# Altium PCB 468524-L.PcbDoc (part 3 of 4)
Units mm, origin at the board's own origin, x right, y up, seen from the top; angles counter-clockwise.
Board outline 160 x 90 mm, 2 copper layers (Top Layer, Bottom Layer), stack 1.571 mm thick; 225 components, 131 nets, 717 pads, 560 vias.
Unrouted connection lines stored in the file: 2.
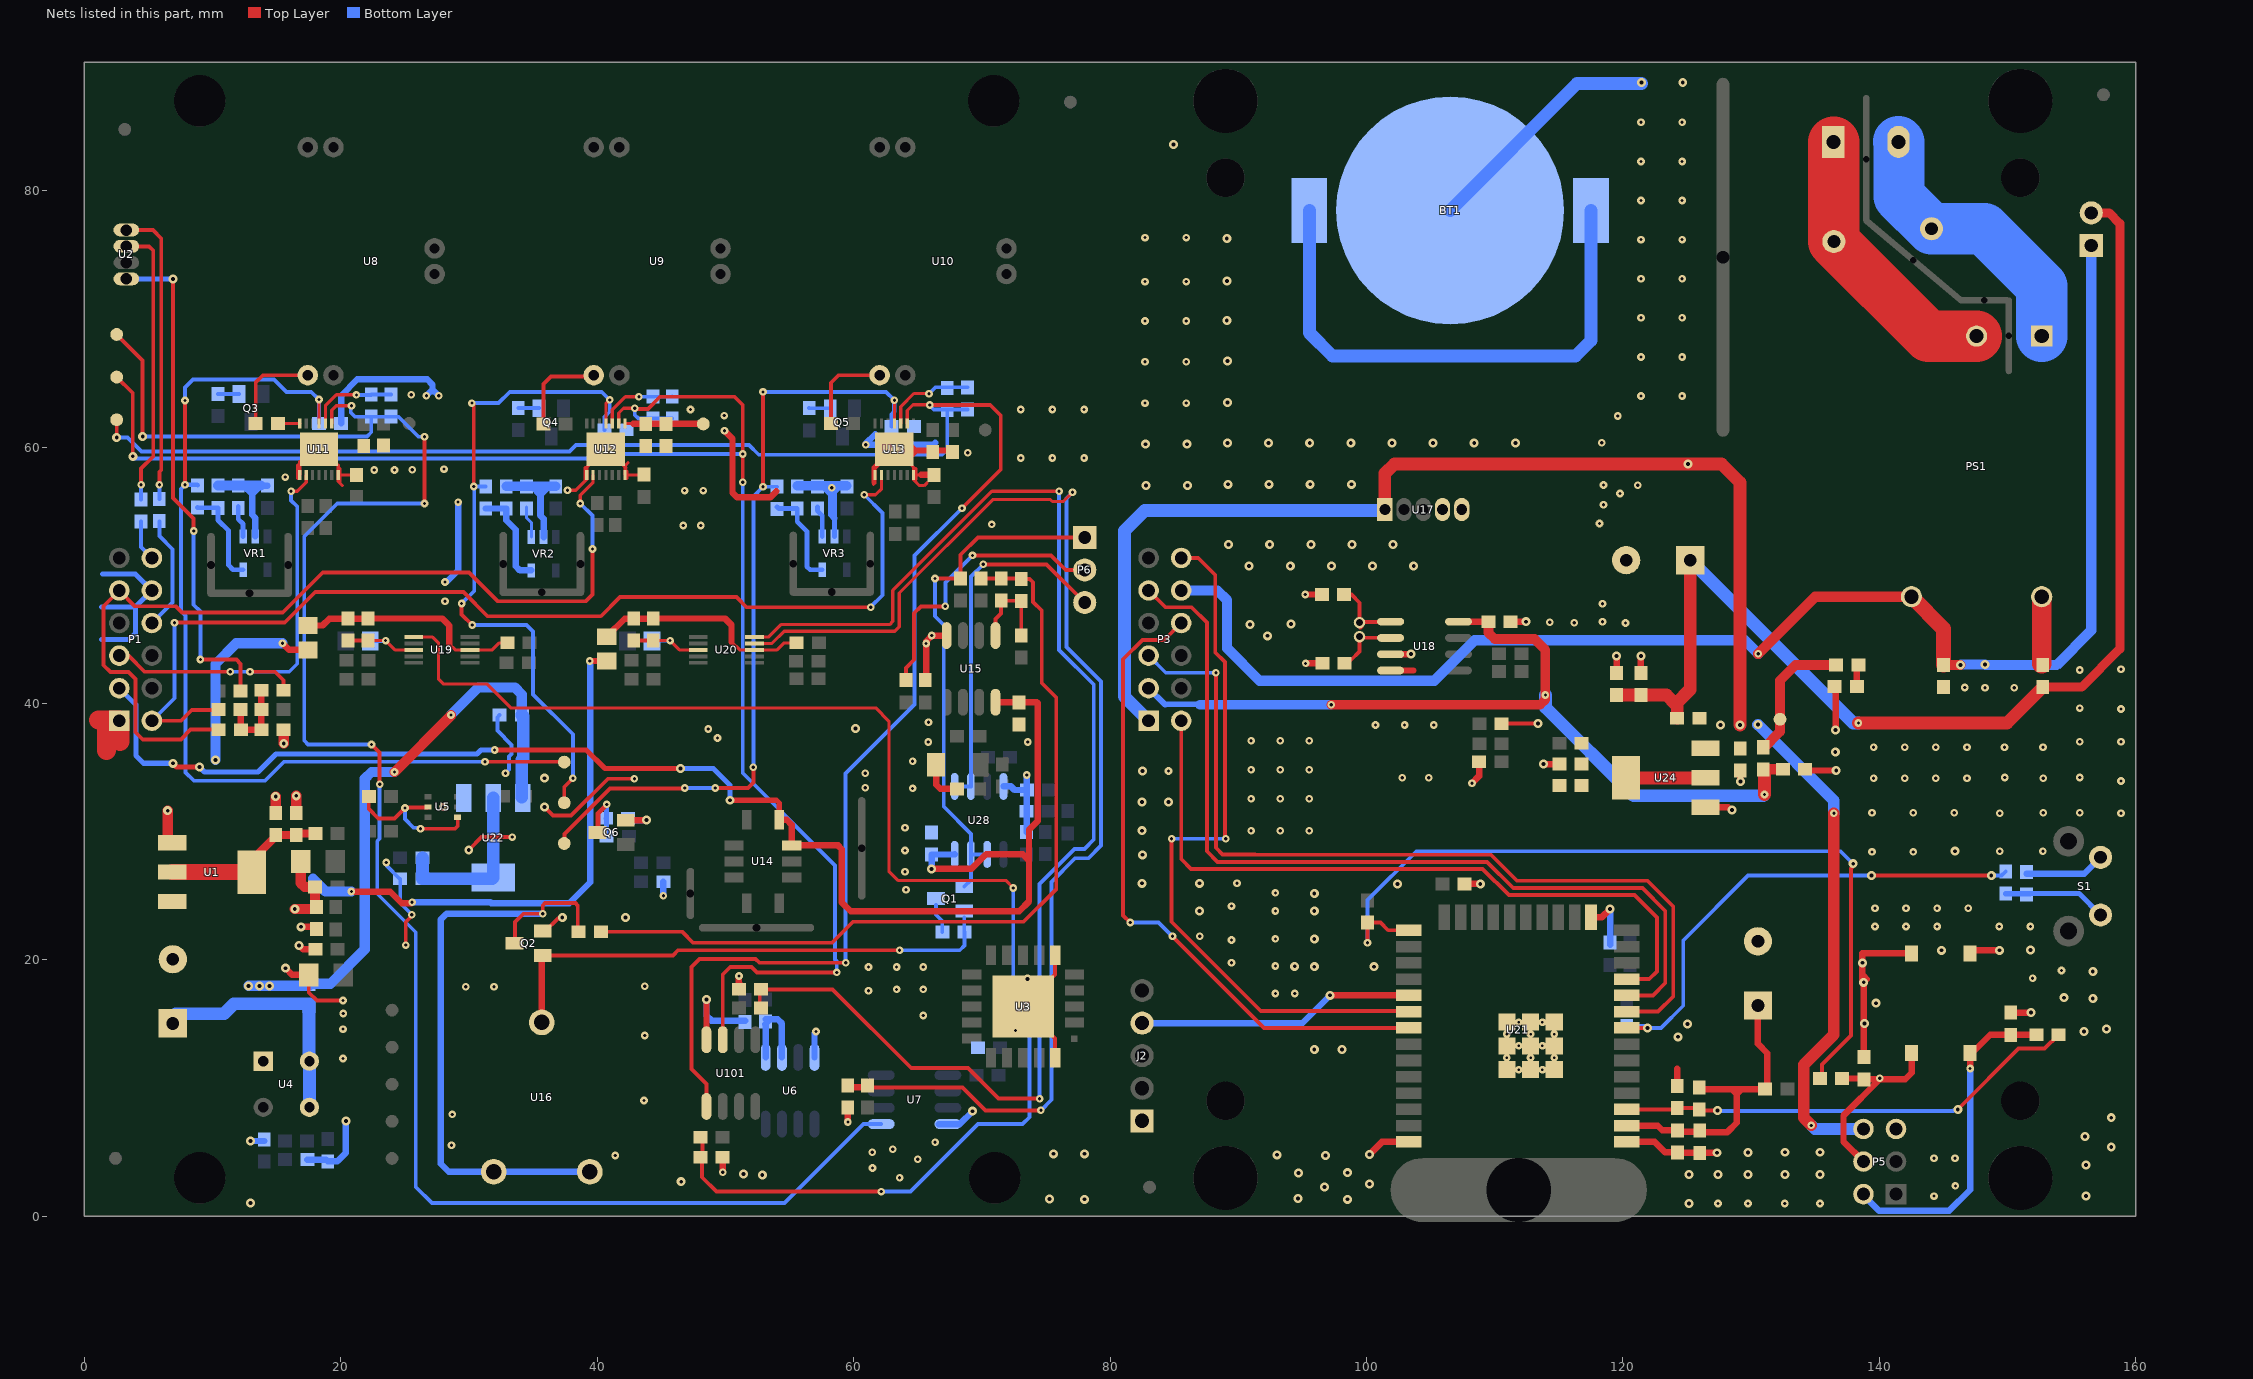
[diagram p2: the nets of this part, all layers, seen from the top]

## Via types
v1: diameter 0.6, hole 0.25, Top Layer to Bottom Layer, tented both sides, 365 vias
v2: diameter 0.7, hole 0.3, Top Layer to Bottom Layer, tented both sides, 179 vias
v3: diameter 0.6, hole 0.2, Top Layer to Bottom Layer, 12 vias
v4: diameter 0.6, hole 0.2, Top Layer to Bottom Layer, tented both sides, 3 vias
v5: diameter 0.6, hole 0.3, Top Layer to Bottom Layer, tented both sides, 1 vias

## Nets (pads, with @x,y where several pads share a name; then routed paths per layer and width w, separated by ;. In a path a pad name is that pad's centre, name@x,y a point inside that pad or via, vN(x,y) a via of type N, cw(c..) or ccw(c..) an arc to the next point about the centre after c; other vN are vias at no path point) (continued)
5P0_RAW: C49.1 C50.1 C51.1 L4.1 L8.2 U23.2 | length 94.7
  Top Layer w0.7: L8.2@152.75,41.279 155.777,41.279 158.75,44.252 158.75,77.425 157.91,78.265 U23.2@156.525,78.265
  Top Layer w1: C50.1@119.499,40.656 123.385,40.656 124.096,39.945 ; L4.1@124.232,38.845 124.232,39.809 124.096,39.945 ; C49.1@125.25,51.175 125.25,41.099 124.096,39.945 ; v1(138.359,38.47) 149.942,38.47 L8.2@152.75,41.279
  Bottom Layer w0.3: C49.1@125.25,51.175 C49.1@125.398,51.027
  Bottom Layer w1: C49.1@125.398,51.027 137.955,38.47 v1(138.359,38.47)
5VCC: C19.1 C57.2 L4.2 L6.1 P1.1 P3.1 P5.6 R20.2 R70.1 T15.1 U1.3 U17.1 U22.3 U24.3 | length 188.9
  Top Layer w0.762: L6.1@130.946,36.495 132.246,37.795 T15.1@132.246,38.77 132.246,41.795 133.446,42.995 R70.1@136.632,42.995 R70.1@136.796,42.995
  Top Layer w0.8: v1(24.194,34.65) 28.59,39.046 v1(28.59,39.1)
  Top Layer w0.9: v1(134.681,7.092) 134.096,7.677 134.096,11.815 136.45,14.169 v1(136.45,31.439)
  Top Layer w1: U17.1@101.425,55.125 101.425,57.925 102.175,58.675 v2(125.075,58.675) 127.675,58.675 129.121,57.229 v2(129.121,38.326)
  Top Layer w1.5: 1.1,38.7 P1.1@2.725,38.7 ; 1.725,36.35 1.725,37.975 ; 2.775,37.025 P1.1@2.775,38.65
  Bottom Layer w0.3: U22.3@34.114,32.696 U22.3@34.185,32.625
  Bottom Layer w0.8: v2(12.8,17.975) v2(13.65,17.975) v2(14.45,17.975) R20.2@17.525,17.975 ; R20.2@17.525,18.139 19.194,18.139 21.875,20.819 21.875,34.132 22.394,34.65 v1(24.194,34.65) ; v1(28.59,39.1) 30.74,41.25 33.564,41.25 34.114,40.7 C19.1@34.114,39.1
  Bottom Layer w0.9: v2(130.53,38.351) 136.45,32.431 v1(136.45,31.439) ; v1(134.681,7.092) 134.961,6.812 P5.6@138.755,6.812
  Bottom Layer w1: U22.3@34.114,32.696 34.114,35.581 34.225,35.692 34.225,38.989 C19.1@34.114,39.1 ; P3.1@83.005,38.65 81.125,40.53 81.125,53.475 82.7,55.05 101.35,55.05 U17.1@101.425,55.125
  other v2: 127.596,38.32
5VCC_D: C55.2 C111.2 L6.2 P3.2 U18.8 | length 68.4
  Top Layer w0.3: L6.2@130.946,34.857 L6.2@131.031,34.772
  Top Layer w0.5: U18.8@107.175,46.381 C111.2@109.516,46.381
  Top Layer w0.75: v1(97.25,39.9) 113.55,39.9 113.95,40.3 v1(113.95,40.656) 113.95,44.181 113.106,45.025 110,45.025 109.516,45.509 C111.2@109.516,46.381
  Top Layer w0.8: L6.2@130.946,34.87 C55.2@132.482,34.87 132.596,34.87 C55.2@132.546,34.82
  Top Layer w1: v1(131.031,32.893) L6.2@131.031,34.772
  Bottom Layer w0.3: v1@130.976,32.837 v1(131.031,32.893)
  Bottom Layer w0.43: 84.295,39.925 87,39.925
  Bottom Layer w0.45: P3.2@83.005,41.19 84.295,39.9
  Bottom Layer w0.75: 87,39.9 v1(97.25,39.9)
  Bottom Layer w1: v1(113.95,40.656) 113.95,39.691 120.84,32.802 130.94,32.802 v1@130.976,32.837
5VCC_D2: C54.2 C65.2 P1.2 U14.9 U14.10 U15.8 U28.8 | length 117.2
  Top Layer w0.4: v2(6.9,35.332) 7.182,35.05 v2(8.975,35.05) ; v1(31.996,36.375) 39.15,36.375 40.6,34.925 v2(46.5,34.925) ; v2(50.35,32.45) 53.995,32.45 54.195,32.25 U14.10@54.195,30.925
  Top Layer w0.5: U14.10@54.195,30.925 54.775,30.925 55.175,30.525 U14.9@55.175,28.925 58.782,28.925 59.075,28.632 59.075,24.474 59.76,23.789 72.914,23.789 73.675,24.55 73.675,27.812 73.675,28.65 73.675,30.15 74.37,30.845 74.37,40.014 74.295,40.089 C65.2@72.9,40.089 ; v2(66.075,27.1) 69.194,27.1 70.325,28.231 73.181,28.231 73.6,27.812 ; U15.8@71.061,40.095 C65.2@72.894,40.095
  Top Layer w0.8: C65.2@72.894,40.095 C65.2@72.9,40.089
  Bottom Layer w0.4: P1.2@2.725,41.19 4.015,39.9 4.015,35.935 4.618,35.332 v2(6.9,35.332) ; v2(8.975,35.05) 9.375,34.65 13.544,34.65 14.944,36.05 30.613,36.05 30.938,36.375 v1(31.996,36.375) ; v2(46.5,34.925) 49.05,34.925 50.35,33.625 v2(50.35,32.45)
  Bottom Layer w0.5: v2(66.075,27.1) C54.2@66.075,28.217 67.863,28.217 U28.8@67.874,28.227
AP_RST: R74.2 R78.2 U21.8 | length 39.3
  Top Layer w0.3: U21.8@120.292,14.692 v2(121.925,14.692)
  Top Layer w0.305: v2(139.371,26.575) v2(148.725,26.575)
  Bottom Layer w0.3: R74.2@120.3,14.861 121.755,14.861 v2(121.925,14.692) 122.967,14.692 124.7,16.425 124.7,21.525 129.75,26.575 v2(139.371,26.575) ; v2(148.725,26.575) 149.537,26.575 R78.2@149.85,26.888
BLUE_0: P3.10 U21.31 | length 51.6
  Top Layer w0.305: v1(81.575,22.911) 81.02,23.466 81.02,43.446 82.525,44.95 84.225,44.95 P3.10@85.545,46.27 ; v1(84.861,21.839) 92.008,14.692 U21.31@103.292,14.692
  Bottom Layer w0.305: v1(81.575,22.911) 83.789,22.911 v1(84.861,21.839)
BLUE_I: P1.10 R7.1 | length 9
  Bottom Layer w0.3: P1.10@5.265,46.27 6.875,47.88 6.875,52.025 5.85,53.05 R7.1@5.85,54.211
C2_H2S: C102.2 R44.1 T7.1 U12.9 U101.3 | length 131.1
  Top Layer w0.25: U12.9@41.675,61.825 41.675,62.65 42.05,63.025 v1(42.925,63.025)
  Top Layer w0.3: v1(42.925,63.025) 42.975,62.975 43.95,62.975 44.896,63.921 50.714,63.921 51.35,63.285 v1(51.35,59.45) v1(51.35,57.25)
  Top Layer w0.305: T7.1@2.52,65.454 3.775,64.199 v2(3.775,59.275) ; U101.3@49.79,13.775 49.79,18.865 50.377,19.452 52.023,19.452 52.45,19.025 v1(58.675,19.025)
  Bottom Layer w0.3: v2(3.775,59.275) 3.95,59.1 41.425,59.1 41.775,59.45 v1(51.35,59.45) ; v1(42.925,63.025) 42.925,62.495 43.208,62.211 R44.1@44.35,62.211 44.363,62.224 C102.2@45.85,62.224 ; v1(51.35,57.25) 51.35,34.575 58.55,27.375 58.55,20.025 58.675,19.9 v1(58.675,19.025)
C2_O3: C101.2 R15.1 T4.1 U7.5 U11.9 | length 150.2
  Top Layer w0.25: U11.9@19.3,61.825 19.3,62.875 19.65,63.225 v1(20.829,63.225)
  Top Layer w0.3: v1(22.4,36.8) 23.031,36.169 v1(23.031,33.7) ; v1(26.525,55.6) v1(26.525,60.8)
  Top Layer w0.305: T4.1@2.52,68.783 4.55,66.753 v2(4.55,60.825)
  Bottom Layer w0.3: v2(4.55,60.825) 22.04,60.825 22.371,61.156 C101.2@22.371,62.361 ; v1(20.829,63.225) 20.775,63.171 20.775,62.7 21.114,62.361 C101.2@22.371,62.361 R15.1@23.921,62.361 24.489,62.361 26.05,60.8 v1(26.525,60.8) ; v1(22.4,36.8) 17.45,36.8 17.15,37.1 17.15,53.025 19.725,55.6 v1(26.525,55.6) ; v1(23.031,33.7) 23.031,29.449 22.84,29.258 22.84,25.16 25.85,22.15 25.85,2.3 27.123,1.027 54.602,1.027 60.77,7.195 U7.5@62.147,7.195
C2_SO2: C103.2 R50.1 T10.1 U13.9 U101.5 | length 153.8
  Top Layer w0.25: U13.9@64.175,61.825 64.175,62.85 64.628,63.303 65.903,63.303 v1(65.928,63.278)
  Top Layer w0.305: T10.1@2.52,62.125 2.525,62.119 v2(2.525,60.75) ; U101.5@48.52,8.575 48.52,10.305 47.35,11.475 47.35,19.45 47.978,20.078 52.347,20.078 52.65,19.775 v1(59.375,19.775) ; v1(65.928,63.278) 70.653,63.278 71.475,62.456 71.475,58.25 v1(68.45,55.225)
  Bottom Layer w0.3: v2(2.525,60.75) 3.361,60.75 4.461,59.65 37.85,59.65 38.35,60.15 51.85,60.15 52.6,59.4 66.9,59.4 67.3,59.8 C103.2@67.3,62.893 ; v1(65.928,63.278) 65.928,63.253 65.925,63.25 66.246,62.929 R50.1@68.875,62.929
  Bottom Layer w0.305: v1(59.375,19.775) 59.375,34.546 64.75,39.921 64.75,51.525 v1(68.45,55.225)
C3_H2S: C113.2 R115.1 U20.5 | length 107.3
  Top Layer w0.25: U20.5@52.263,45.175 53.35,45.175 54.325,46.15 62.8,46.15 63.05,46.4 63.05,48.819 70.783,56.552 v1(76.025,56.552)
  Top Layer w0.305: C113.2@52.675,17.7 52.675,16.364 R115.1@52.789,16.25 ; C113.2@52.789,17.7 58.35,17.7 64.494,11.556 68.904,11.556 71.284,9.175 v1(74.504,9.175)
  Bottom Layer w0.305: v1(74.504,9.175) 74.504,25.938 74.6,26.035 77.215,28.65 78,28.65 78.725,29.375 78.725,41.475 76.025,44.175 v1(76.025,56.552)
C3_O3: C112.2 R114.1 U20.4 | length 99.3
  Top Layer w0.25: U20.4@52.263,44.675 53.625,44.675 54.575,45.625 63.2,45.625 63.55,45.975 63.55,48.612 70.838,55.9 75.35,55.9 75.5,55.75 76.35,55.75 v1(77.075,56.475)
  Top Layer w0.305: R114.1@61.075,10.05 68.495,10.05 70.28,8.265 v1(74.6,8.265)
  Top Layer w0.508: C112.2@59.55,10.1 59.6,10.05 R114.1@61.075,10.05
  Bottom Layer w0.305: v1(74.6,8.265) 75.425,9.09 75.425,26.075 77.275,27.925 78.3,27.925 79.3,28.925 79.3,41.696 76.588,44.408 76.588,55.988 v1(77.075,56.475)
C3_SO2: C114.2 R116.1 U19.6 | length 113.4
  Top Layer w0.25: U19.6@25.675,45.175 27.156,45.175 27.625,44.706 27.625,41.881 27.981,41.525 31.375,41.525 33.25,39.65 61.725,39.65 62.75,38.625 62.75,26.9 62.975,26.675 62.975,26.673 63.45,26.198 71.86,26.198 v1(72.45,25.608)
  Top Layer w0.305: C114.2@48.061,4.6 48.225,4.764 R116.1@48.225,6.175 ; C114.2@48.175,4.6 48.175,3.05 49.3,1.925 v1(62.15,1.925)
  Bottom Layer w0.305: v1(62.15,1.925) 64.438,1.925 69.71,7.198 73.173,7.198 73.7,7.725 73.7,17.025 72.45,18.275 v1(72.45,25.608)
CH2S: R43.1 U9.5 | length 7.3
  Top Layer w0.3: R43.1@35.811,61.8 35.811,64.911 36.4,65.5 39.625,65.5 U9.5@39.725,65.6
CO3: R14.1 U8.5 | length 7.5
  Top Layer w0.3: R14.1@13.361,61.839 13.361,65.029 13.933,65.6 U8.5@17.425,65.6
CSO2: R49.1 U10.5 | length 7.2
  Top Layer w0.3: R49.1@58.238,61.839 58.238,65.016 58.822,65.6 U10.5@62.025,65.6
EN: C61.2 R73.2 R79.2 U21.3 | length 36.2
  Top Layer w0.305: U21.3@120.292,8.342 122.8,8.342 123.35,8.342 124.037,8.342 C61.2@124.188,8.493 ; C61.2@124.245,8.436 125.848,8.436 126.034,8.25 v2(127.375,8.25) ; v2(146.112,8.342) 150.845,13.075 152.889,13.075 R79.2@153.964,14.15
  Bottom Layer w0.305: v2(127.375,8.25) 127.4,8.225 145.736,8.225 145.777,8.266 146.036,8.266 v2(146.112,8.342)
EN_F: C64.2 P5.2 R79.1 S3.1 | length 26.1
  Top Layer w0.5: v1(147.075,11.525) S3.1@147.075,12.6 ; S3.1@147.075,12.75 S3.1@147.075,12.6 ; R79.1@152.236,14.15 150.261,14.15 C64.2@150.25,14.161 148.636,14.161 S3.1@147.075,12.6
  Bottom Layer w0.5: P5.2@138.755,1.732 138.755,1.643 139.966,0.432 145.434,0.432 147.075,2.073 v1(147.075,11.525)
GND1_ADS: C46.1 C47.1 C48.1 FB4.1 U20.3 | length 17.4
  Top Layer w0.25: 50.475,44.8 51.1,44.175 U20.3@52.263,44.175 54.025,44.175 54.575,44.725 C46.1@55.561,44.725
  Top Layer w0.5: FB4.1@40.75,45.217 42.147,46.614 44.353,46.614 C48.1@44.367,46.629 49.971,46.629 50.475,46.125 50.475,44.8
GND_ADS: C43.1 C44.1 C45.1 FB3.1 U19.3 | length 17.9
  Top Layer w0.25: 28.459,44.632 28.916,44.175 U19.3@30.075,44.175 31.821,44.175 32.371,44.725 C43.1@32.986,44.725
  Top Layer w0.5: FB3.1@17.45,46.077 18.577,46.077 19.114,46.614 22.1,46.614 C45.1@22.114,46.629 27.906,46.629 28.459,46.075 28.459,44.632
GND_L: C2.2 C5.1 C7.1 C8.1 C9.1 C10.1 C11.1 C12.1 C13.1 C14.1 C15.1 C17.1 C18.1 C19.2 C20.1 C21.1 C25.1 C26.1 C27.1 C29.1 C30.1 C31.1 C32.1 C34.1 C35.1 C36.1 C38.1 C39.1 C40.1 C41.1 C54.1 C65.1 C66.1 C112.1 C113.1 C114.1 L2.2 Q2.3 Q6.2 R21.2 R23.1 R36.1 R38.1 R54.1 R71.1 R86.1 U3.6 U3.20 U3.21 U5.2 U5.4 U5.DIEPAD U6.4 U7.4 U11.1 U11.7 U11.15 U12.1 U12.7 U12.15 U13.1 U13.7 U13.15 U15.4 U22.1 U28.4 U101.4 VR1.2 VR2.2 VR3.2 ZD1.1 | length 195.9
  Top Layer w0.25: 16.65,57.55 16.65,58.575 ; 16.775,58.875 16.8,58.85 U11.1@16.8,57.825 ; 19.8,58.58 U11.7@19.8,57.825 ; 19.937,57.275 19.937,57.825 ; 19.937,58.3 19.937,57.825 ; 20.134,56.992 19.8,57.326 U11.7@19.8,57.825 ; C14.1@21.214,57.825 19.937,57.825 ; v1(37.681,56.625) 38.321,56.625 39.175,57.479 U12.1@39.175,57.825 39.175,58.325 ; 39.041,57.418 39.041,58.381 ; 39.091,58.331 U12.15@39.405,58.646 ; U12.15@41.914,58.69 42.175,58.429 ; 42.179,58.351 42.175,58.354 ; U12.7@42.214,57.63 U12.7@42.214,57.825 ; 42.214,58.355 U12.7@42.214,57.825 ; 42.225,58.379 42.175,58.429 ; 42.304,57.555 42.304,57.825 ; 42.304,58.105 42.304,57.825 ; 42.4,58.775 42.175,58.55 42.175,58.429 ; C32.1@43.65,57.839 43.636,57.825 42.304,57.825 ; 61.525,57.186 61.525,58.421 U13.15@61.69,58.585 ; 61.538,57.082 61.675,57.219 U13.1@61.675,57.825 61.675,58.325 U13.15@63.175,59.825 ; U13.15@64.395,58.696 64.764,58.327 ; U13.7@64.674,57.875 64.674,58.377 ; 64.864,57.466 64.864,57.825 ; 64.864,58.327 64.864,57.825 ; 65.275,57.825 64.864,57.825 ; 65.725,57.225 65.492,56.992 65.133,56.992 64.675,57.45 U13.7@64.675,57.825 64.864,57.825 ; U11.7@19.8,57.825 19.937,57.825 ; 42.175,58.354 42.175,58.429 ; 42.175,58.354 U12.7@42.175,57.825 U12.7@42.214,57.825 ; U12.7@42.214,57.825 42.304,57.825
  Top Layer w0.3: C2.2@17.504,18.825 17.504,17.462 18.14,16.825 v1(20.176,16.825) ; C14.1@21.214,57.825 C14.1@21.225,57.814 ; C10.1@22.186,32.743 22.186,31.768 22.918,31.035 24.188,31.035 v1(25,31.847) 25.039,31.886 26.776,31.886 U5.2@26.815,31.925 ; v1(25.068,21.15) 25.068,22.95 25.535,23.417 v1(25.535,23.526) ; v1(26.215,30.225) 28.902,30.225 29.124,30.447 29.124,31.116 U5.4@29.115,31.125 ; v2(29.98,28.58) 30.975,29.575 v1(33.375,29.575) ; Q2.3@35.75,22.25 35.95,22.25 36.935,23.235 37.2,23.235 v2(37.277,23.312) ; v2(35.875,31.925) 36.543,31.257 37.96,31.257 40.828,34.125 v1(42.899,34.125) ; U3.20@75.715,12.364 75.715,13.864 U3.21@73.215,16.364 75.715,18.864 U3.6@75.715,20.364
  Top Layer w0.5: v2(15.7,19.35) 16.225,18.825 C2.2@17.504,18.825 ; v2(16.75,21.125) 17.05,20.825 C5.1@18.011,20.825 ; v2(16.907,22.579) L2.2@18.107,22.579 ; C2.2@17.471,19 C2.2@17.5,19.029 ; Q6.2@42.225,30.89 42.235,30.9 v2(43.85,30.9) ; U101.4@48.52,13.775 v2(48.52,16.92) ; v1(49.789,3.436) C114.1@49.789,4.6 ; v1(49.925,61.275) 50.547,60.653 50.547,56.439 50.9,56.086 53.511,56.086 53.975,56.55 ; v1(59.55,7.35) C112.1@59.55,8.486 ; U13.15@64.307,60.2 64.682,59.825 ; U13.15@64.42,59.3 64.795,59.675 ; 64.707,59.725 C39.1@67.701,59.725 ; 65.275,57.825 66.25,57.825 C41.1@66.261,57.814 ; R54.1@65.575,41.814 65.65,41.889 v1(65.65,44.68) 65.65,44.85 v1(66.095,45.295) U15.4@67.251,45.295 ; ZD1.1@66.431,35.221 66.431,33.669 66.75,33.35 68.036,33.35 C66.1@68.061,33.325
  Top Layer w0.508: v1(51.05,18.75) 51.05,18.186 C113.1@51.061,18.175
  Bottom Layer w0.3: v1(23.54,27.599) 23.598,27.541 23.598,27.32 24.585,26.333 C15.1@24.636,26.333 24.636,24.425 v1(25.535,23.526) ; v1(25,31.847) 25,30.985 25.684,30.302 26.139,30.302 v1(26.215,30.225) ; C19.2@32.386,39.1 32.209,38.923 32.209,37.882 33.325,36.765 33.325,36.064 33.123,35.863 33.123,34.825 v1(32.85,34.552)
  Bottom Layer w0.381: VR3.2@58.502,53.024 58.502,54.457 58.502,56.552 58.766,56.816
  Bottom Layer w0.5: C9.1@12.402,56.989 13.083,56.308 ; v2(12.95,5.875) C17.1@14.027,5.875 ; VR1.2@13.332,53.029 13.332,54.462 13.083,54.711 13.083,56.308 ; C7.1@14.282,56.989 13.764,56.989 13.083,56.308 ; R23.1@17.391,4.425 18.836,4.425 R21.2@18.975,4.286 19.739,4.286 20.402,4.95 v2@20.402,7.425 ; C13.1@20.029,61.839 20.029,64.01 21.293,65.275 26.735,65.275 27.153,64.856 27.153,64.477 ; v1(26.675,63.999) 27.153,64.477 ; v1(27.632,63.999) 27.153,64.477 ; v1(28.134,49.475) 28.153,49.494 28.261,49.494 29.151,50.385 v1(29.151,55.703) ; C26.1@34.486,56.93 C26.1@34.887,56.93 ; C26.1@34.883,56.934 C26.1@34.887,56.93 ; VR2.2@35.813,52.974 35.813,54.407 ; 36.245,56.934 35.615,56.305 ; R36.1@42.414,31.037 42.55,30.9 v2(43.85,30.9) ; v1(45.158,25) R38.1@45.158,26.093 ; v2(48.52,16.92) 48.52,15.655 48.908,15.267 C18.1@51.531,15.267 ; U6.4@56.946,12.395 56.946,14.269 57.066,14.389 v1(57.066,14.416) ; C35.1@57.572,56.984 58.253,56.303 ; 58.502,54.457 58.253,54.706 58.253,56.303 ; 58.934,56.984 58.253,56.303 ; 61.68,61 60.95,60.27 v1(60.95,60.175) 66.221,60.175 66.371,60.325 ; U7.4@66.647,7.195 U7.4@67.347,7.195 68.271,7.195 69.276,8.2 v2(69.278,8.2) ; U28.4@71.684,33.527 72.273,33.527 72.55,33.25 C21.1@73.511,33.25 ; R71.1@73.486,29.962 73.511,29.986 C21.1@73.511,33.25 ; v1(73.5,34.425) 73.5,33.261 C21.1@73.511,33.25 ; C26.1@34.887,56.93 35.564,56.253 ; C26.1@34.887,56.93 35.361,56.93 35.615,56.675 35.615,56.305 ; 35.564,56.253 35.615,56.305 ; 35.564,56.253 35.564,54.656 35.813,54.407 ; 35.615,56.305 35.615,54.61 35.813,54.412 35.813,54.407
  Bottom Layer w0.762: C8.1@10.425,56.989 C9.1@12.006,56.989 12.402,56.989 13.764,56.989 ; C27.1@32.906,56.934 34.883,56.934 36.245,56.934 C25.1@36.763,56.934 ; C36.1@55.594,56.984 57.572,56.984 58.934,56.984 C34.1@59.452,56.984
  other v1: 63.585,3 61.475,3.775 65,4.45 41.4,4.74 61.452,5 63.046,5.225 28.635,5.55 66.354,5.775 28.691,7.95 43.65,9.037 20.176,12.302 43.7,14.1 72.622,14.484 20.176,14.6 65.425,15.655 20.196,15.821 61.15,17.592 63.35,17.7 65.425,17.7 29.743,17.9 31.95,17.9 43.7,17.95 61.15,19.45 63.35,19.452 65.425,19.452 64.075,25.468 64.009,26.873 64.009,28.533 64.009,30.3 27.965,31.925 64.6,33.375 60.91,33.425 60.91,34.549 64.6,35.485 65.825,37 73.57,37 49.375,37.3 48.657,38 65.829,38.541 28.134,47.965 46.704,53.885 48.075,53.885 70.775,53.965 46.816,56.6 48.275,56.6 58.292,56.816 15.664,57.65 22.614,58.2 24.194,58.2 25.575,58.225 28.05,58.275 73.025,59.15 75.5,59.15 77.975,59.15 68.9,59.55 49.9,62.45 73.025,62.925 75.5,62.925 77.975,62.925 47.275,62.928 25.492,64.082
  other v2: 12.95,1.027 78,1.329 75.26,1.35 46.55,2.7 52.875,3.225 51.399,3.3 75.575,4.875 78,4.875 20.405,7.423 73.565,18.514 42.192,23.312 35.875,34.171 60.152,38.05
GND_POWER: BT1.1 C49.2 C50.2 C51.2 C52.1 C53.2 C55.1 C56.1 C57.1 C58.2 C59.1 C60.1 C61.1 C62.1 C63.1 C64.1 C67.1 C111.1 C115.1 C116.1 D2.2 J2.1 L5.2 P5.5 R75.1 R81.2 S1.2 S2.2 S3.2 U17.4 U17.5 U18.4 U21.1 U21.15 U21.38 U21.39 U24.1 | length 83.9
  Top Layer w0.3: C67.1@110.538,38.426 v2(113.373,38.426)
  Top Layer w0.5: v1(95.225,48.5) C115.1@96.511,48.5 ; v1(95.25,43.125) C116.1@96.561,43.125 ; U18.4@101.875,42.571 103.654,42.571 ; R75.1@107.479,25.925 R75.1@107.642,25.925 v2(108.875,25.925) ; C111.1@111.145,46.381 111.151,46.375 v2(112.425,46.375) ; v2(113.796,35.27) C52.1@115.035,35.27 C52.1@115.05,35.27 ; U21.15@117.507,23.312 118.333,23.312 v2(118.996,23.975) ; C50.2@119.499,42.27 C50.2@119.499,42.385 v2@119.499,43.67 ; U21.1@120.292,5.802 122.47,5.802 123.289,4.982 C60.1@124.247,4.982 124.272,4.957 C59.1@125.997,4.957 v2(127.336,4.957) ; C51.2@121.399,42.27 C51.2@121.399,42.385 v2(121.399,43.695) ; C61.1@124.245,10.05 C61.1@124.245,10.164 124.245,11.523 124.247,11.525 ; C59.1@125.972,5.097 C59.1@125.997,5.072 ; U24.1@126.446,31.9 128.223,31.9 128.442,31.681 v2(128.496,31.681) ; C57.1@129.146,34.837 129.146,33.912 v2(129.156,33.902) ; C55.1@134.096,34.87 C55.1@134.21,34.87 134.214,34.867 134.25,34.903 134.38,34.773 v2(136.632,34.773) ; D2.2@136.558,41.32 136.586,41.293 v2(136.586,37.92) ; v2(138.675,19.775) 138.675,18.5 v2(138.775,18.252) ; C62.1@138.775,12.6 v2(138.775,18.252) ; 138.775,18.752 139.025,18.502 v2(138.775,18.252) ; S3.2@147.075,20.5 S3.2@147.225,20.35
  Top Layer w0.508: v2(100.225,4.825) 101.201,5.802 U21.38@103.292,5.802 ; v1(108.222,33.774) 108.781,34.333 C56.1@108.781,35.445 ; v2(138.675,19.775) 138.675,20.5 S2.2@142.515,20.5 ; S3.2@147.075,20.5 147.325,20.75 v2(149.375,20.75) ; C64.1@150.25,15.889 151.814,15.889 v2(151.825,15.9)
  Bottom Layer w0.5: R81.2@118.996,21.18 R81.2@118.996,21.344 v2(118.996,23.975) ; C63.1@151.475,26.726 155.976,26.726 S1.2@157.25,28
  Bottom Layer w1: BT1.1@106.525,78.45 116.425,88.35 v2@121.45,88.35
  other v1: 127.408,1 129.75,1 132.625,1 135.361,1 144.265,1.575 145.925,2.375 144.265,4.524 145.895,4.524 92.889,17.375 94.4,17.375 151.95,18.575 154.204,19.175 92.889,19.519 89.465,19.772 89.465,21.55 92.889,21.637 87,21.839 139.65,22.6 142.075,22.6 144.5,22.6 149.35,22.6 151.777,22.6 92.889,23.806 139.65,24.033 142.075,24.033 144.5,24.033 146.925,24.033 89.465,24.195 92.889,25.225 89.903,25.975 139.42,28.425 142.633,28.425 149.379,28.475 152.75,28.475 90.997,30.075 93.266,30.075 95.535,30.075 149.379,31.439 158.838,31.439 139.42,31.475 142.633,31.475 145.845,31.475 152.782,31.475 155.625,31.475 90.997,32.561 93.266,32.561 95.535,32.561 158.838,33.956 139.55,34.17 141.975,34.17 144.4,34.17 146.825,34.17 152.782,34.17 102.792,34.2 104.852,34.2 149.775,34.22 155.625,34.22 84.55,34.727 90.997,34.83 93.266,34.83 95.535,34.83 139.55,36.589 141.975,36.589 144.4,36.589 146.825,36.589 149.75,36.589 152.758,36.589 155.625,37.006 158.838,37.006 90.997,37.098 93.266,37.098 95.535,37.098 100.7,38.325 102.969,38.325 105.237,38.325 158.838,39.567 155.625,39.635 148.236,41.228 150.525,41.228 146.65,41.25 155.625,42.613 158.838,42.67 120.2,46.275 116.2,46.3 114.287,46.325 118.4,46.375 118.4,47.775 118.175,54.03 118.475,55.5 119.775,56.375 118.475,57.033 121.15,57.025 118.35,60.337 119.6,62.412 82.725,63.425 85.942,63.425 121.4,63.975 124.612,63.975 82.725,66.65 85.942,66.65 121.4,67.025 124.612,67.025 82.725,69.825 85.942,69.825 121.4,70.075 124.612,70.075 82.725,72.9 85.942,72.9 121.4,73.125 124.612,73.125 121.4,76.175 124.612,76.175 82.725,76.33 85.942,76.33 121.4,79.225 124.612,79.225 121.4,82.275 124.612,82.275 121.4,85.325 124.612,85.325
  other v2: 125.15,1 98.52,1.329 94.664,1.4 156.126,1.575 96.725,2.275 100.225,2.525 125.15,3.25 127.408,3.25 129.75,3.25 132.625,3.25 135.361,3.25 94.69,3.375 98.51,3.4 156.126,4 96.8,4.75 93.025,4.8 129.75,4.972 132.625,4.997 135.361,4.997 158.082,5.402 156.027,6.238 158.082,7.692 95.925,13.002 98.075,13.002 124.3,14 155.97,14.425 157.725,14.6 125.025,14.998 138.842,15.025 139.746,16.623 156.641,17 154.4,17.05 156.641,19.1 95.925,19.469 100.576,19.469 94.4,19.5 144.837,20.75 151.775,20.775 95.925,21.637 86.967,23.806 95.925,23.806 95.925,25.175 102.407,25.923 82.5,25.975 86.967,25.975 82.525,28.198 145.895,28.475 82.5,30.075 82.5,32.314 84.55,32.314 82.525,34.726 136.558,36.226 119.499,43.695 92.275,45.275 90.9,46.15 94.1,46.209 90.846,50.717 94.054,50.717 97.262,50.717 100.47,50.717 103.678,50.717 89.242,52.392 92.45,52.392 95.658,52.392 98.866,52.392 102.074,52.392 82.809,57.009 86.034,57.009 89.192,57.092 92.4,57.092 95.608,57.092 98.816,57.092 82.767,60.217 85.992,60.217 89.15,60.3 92.358,60.3 95.566,60.3 98.774,60.3 101.982,60.3 105.191,60.3 108.399,60.3 111.607,60.3 89.15,63.475 89.15,66.7 89.1,69.875 89.125,72.95 89.1,76.25 84.95,83.6 121.45,88.425 124.662,88.425
  other v3: 111.867,11.442 113.717,11.442 110.942,12.367 112.792,12.367 114.642,12.367 111.867,13.292 113.717,13.292 110.942,14.217 112.792,14.217 114.642,14.217 111.867,15.142 113.717,15.142
GND_POWER_A: C1.1 C3.2 C4.1 C6.2 C16.2 FB3.2 FB4.2 L2.1 P1.11 R5.2 U1.1 U4.1 | length 83.7
  Top Layer w0.5: v1(15.45,44.7) 15.978,44.172 FB3.2@17.45,44.172 ; v1(20.825,25.326) 23.849,25.326 24.75,24.425 25.5,24.425 v1(25.563,24.488) ; v1(39.412,43.312) FB4.2@40.75,43.312
  Top Layer w0.8: U1.1@6.5,29.225 v2(6.5,31.637) ; C1.1@14.925,31.35 C1.1@14.925,31.464 v2(14.925,32.75) ; R5.2@15.539,37.955 15.55,37.944 v2(15.55,36.875) ; v2(16.413,23.965) 16.413,23.975 18.107,23.975 L2.1@17.983,24.099 ; C6.2@16.525,31.4 v2(16.525,32.8) ; C3.2@16.884,27.686 16.884,25.991 17.192,25.683 C4.1@17.995,25.683 L2.1@17.995,24.185
  Bottom Layer w0.4: 1.325,44.996 3.525,45 3.975,45.45 3.975,47.536 ; 1.325,47.536 3.975,47.536 ; 1.427,50.084 3.991,50.084 P1.11@5.265,48.81 3.991,47.536 3.975,47.536
  Bottom Layer w0.5: v1(25.563,24.488) 31.676,24.488 31.739,24.425 37.825,24.425 39.45,26.05 39.45,43.274 v1(39.412,43.312)
  Bottom Layer w0.8: v2(10.225,35.6) 10.225,43.074 11.851,44.7 v1(15.45,44.7) ; 17.825,26.333 18.832,25.326 v1(20.825,25.326)
GND_POWER_I: L5.1 P3.11 PS1.4 U23.1 | length 114.7
  Top Layer w0.3: L5.1@145.002,43.006 L5.1@145.013,42.995
  Top Layer w0.8: v1(130.546,43.875) 134.996,48.325 PS1.4@142.5,48.325 ; L5.1@145.013,42.995 v2(146.325,42.995)
  Top Layer w1.2: PS1.4@142.5,48.325 145.002,45.823 L5.1@145.002,43.006
  Bottom Layer w0.8: P3.11@85.545,48.81 88.365,48.81 89.125,48.05 89.125,44.3 91.65,41.775 105.275,41.775 108.425,44.925 129.496,44.925 v1(130.546,43.875) ; v2(146.325,42.995) 146.359,43.029 v2(148.236,43.029) 148.272,42.993 153.816,42.993 156.525,45.701 U23.1@156.525,75.725
GREEN_0: P3.12 U21.30 | length 56.2
  Top Layer w0.3: P3.12@85.545,51.35 86.877,51.35 88.203,50.024 88.203,43.977 88.95,43.23 88.95,29.525 v1(89.025,29.45)
  Top Layer w0.305: v1(84.8,29.45) 84.8,22.975 91.75,16.025 103.229,16.025 U21.30@103.292,15.962
  Bottom Layer w0.3: v1(84.8,29.45) v1(89.025,29.45)
GREEN_I: P1.12 R8.1 | length 3.2
  Bottom Layer w0.305: R8.1@4.425,54.186 4.425,52.19 P1.12@5.265,51.35
INT: J2.4 U21.29 | length 21.7
  Top Layer w0.5: v2(97.159,17.24) 103.283,17.24 U21.29@103.292,17.232
  Bottom Layer w0.5: J2.4@82.5,15.07 94.988,15.07 v2(97.159,17.24)
IO0: R76.2 R77.2 U21.25 | length 66
  Top Layer w0.3: R76.2@100.075,22.911 101.089,22.911 101.688,22.312 U21.25@103.292,22.312 U21.25@103.288,22.315
  Top Layer w0.305: v1(100.075,21.344) R76.2@100.075,22.911 ; R77.2@135.525,10.75 135.525,11.825 137.8,14.1 137.8,27.124 137.879,27.203 137.879,27.424 v2(137.955,27.5)
  Bottom Layer w0.305: v1(100.075,21.344) 100.075,24.655 103.895,28.475 136.98,28.475 v2(137.955,27.5)
IO_F: C62.2 P5.4 R77.1 S2.1 | length 15.5
  Top Layer w0.5: R77.1@137.089,10.75 138.736,10.75 C62.2@138.8,10.686 v1@140.025,10.686 ; P5.4@138.755,4.272 137.2,5.827 137.2,7.861 v1@140.025,10.686 ; v1(140.025,10.774) v1@140.025,10.686 ; S2.1@142.515,12.75 142.515,11.19 142.011,10.686 v1@140.025,10.686
M_H2S: P3.5 U21.10 | length 70.1
  Top Layer w0.3: P3.5@83.005,48.81 84.315,47.5 86.35,47.5 87.55,46.3 87.55,28.475 88.377,27.648 109.393,27.648 111.44,25.6 121.521,25.6 123.3,23.821 123.3,18.2 122.332,17.232 U21.10@120.292,17.232
M_O3: P3.3 U21.9 | length 68.2
  Top Layer w0.3: v1(88.25,42.4) 88.25,28.75 88.777,28.223 91.309,28.223 91.334,28.198 109.7,28.198 111.722,26.175 121.914,26.175 123.925,24.164 123.925,17.14 122.746,15.962 U21.9@120.292,15.962
  Bottom Layer w0.3: P3.3@83.005,43.73 84.345,42.39 88.24,42.39 v1(88.25,42.4)
M_SO2: P3.7 U21.11 | length 56.6
  Top Layer w0.3: P3.7@85.545,38.65 85.545,27.855 86.302,27.098 109.052,27.098 111.1,25.05 120.9,25.05 122.65,23.3 122.65,19.1 122.052,18.502 U21.11@120.292,18.502
MENB_H2S: P1.5 R2.1 U12.2 | length 70.6
  Top Layer w0.25: v1(38.675,55.6) 38.675,56.25 39.675,57.25 U12.2@39.675,57.825
  Top Layer w0.3: R2.1@10.475,37.955 8.28,37.955 7.525,37.2 4.55,37.2 4,37.75 4,41.9 3.45,42.45 2.025,42.45 1.5,42.975 1.5,47.585 P1.5@2.725,48.81 3.96,47.575 7.15,47.575 7.625,47.1 15.47,47.1 18.595,50.225 30.001,50.225 32.26,47.965 39.088,47.965 39.625,48.502 v1(39.625,52.05)
  Bottom Layer w0.3: v1(38.675,55.6) 39.625,54.65 v1(39.625,52.05)
MENB_O3: P1.3 R1.1 U11.2 | length 34
  Top Layer w0.25: v1(16.125,56.55) 16.6,56.55 17.3,57.25 U11.2@17.3,57.825
  Top Layer w0.3: P1.3@2.725,43.73 3.445,43.73 4.7,42.475 v1(11.375,42.475) ; v1(12.925,42.475) 14.875,42.475 15.539,41.811 R1.1@15.539,41.025
  Bottom Layer w0.3: v1(11.375,42.475) v1(12.925,42.475) 15.975,42.475 16.6,43.1 16.6,55.354 16.125,55.829 v1(16.125,56.55)
MENB_SO2: P1.7 R3.1 U13.2 | length 83.3
  Top Layer w0.25: v1(60.825,56.275) 61.7,56.275 62.175,56.75 U13.2@62.175,57.825
  Top Layer w0.3: P1.7@5.265,38.65 7.525,38.65 8.375,39.5 R3.1@10.436,39.5 ; v1(7.025,46.3) 15.625,46.3 18.009,48.684 29.566,48.684 31.45,46.8 40.28,46.8 41.78,48.3 50.85,48.3 51.65,47.5 v1@61.325,47.5
  Top Layer w0.305: R3.1@10.436,39.5 R3.1@10.461,39.525
  Bottom Layer w0.3: P1.7@5.265,38.65 7.025,40.41 v1(7.025,46.3) ; v1(60.825,56.275) 62.25,54.85 62.25,48.435 v1(61.325,47.51)
NetBT1_S1: BT1.S1 BT1.S2 U18.3 | length 44.5
  Top Layer w0.52: U18.3@101.875,43.841 103.466,43.841 v2(103.475,43.85)
  Bottom Layer w1: BT1.S2@95.54,78.45 95.54,68.91 97.35,67.1 116.3,67.1 117.51,68.31 BT1.S1@117.51,78.45
NetC1_2: C1.2 C6.1 R9.2 U1.2 U1.4 | length 13
  Top Layer w0.635: U1.4@13.05,26.85 13.05,27.761 15.025,29.736 C6.1@16.525,29.736 16.639,29.85 R9.2@18.025,29.85
  Top Layer w1.27: U1.2@6.85,26.85 U1.4@13.05,26.85
NetC8_2: C8.2 R10.1 VR1.5 | length 7.7
  Bottom Layer w0.381: R10.1@8.825,55.287 8.851,55.261 C8.2@10.425,55.261 10.425,54.3 11.247,53.478 11.247,50.778 11.596,50.429 VR1.5@12.382,50.429
NetC9_2: C9.2 VR1.1 | length 2.5
  Bottom Layer w0.381: C9.2@12.006,55.375 C9.2@12.006,55.261 12.006,54.369 12.382,53.993 VR1.1@12.382,53.029
NetC13_2: C13.2 R10.2 T3.1 U11.11 | length 77.1
  Top Layer w0.25: U11.11@18.3,61.825 v1(18.3,63.7) 18.3,63.775 v1@18.325,63.8
  Top Layer w0.3: v1(7.85,57.05) v1(7.85,63.625) ; v1(31.241,35.45) 37.046,35.45 37.075,35.479 37.277,35.277 T3.1@37.425,35.425
  Bottom Layer w0.3: v1(7.85,57.05) 7.525,56.725 7.525,47.225 7.9,46.85 7.9,34.625 8.55,33.975 14.1,33.975 15.575,35.45 v1(31.241,35.45) ; v1(7.85,63.625) 7.85,64.65 8.475,65.275 14.8,65.275 15.775,64.3 17.7,64.3 v1(18.3,63.7) C13.2@18.3,61.839
  Bottom Layer w0.35: v1(7.85,57.05) 8.789,57.05 R10.2@8.825,57.014
NetC15_2: C15.2 R24.2 U22.2 U22.4 | length 13.3
  Bottom Layer w1: C15.2@26.364,26.334 R24.2@26.364,27.955 ; C15.2@26.41,26.333 31.793,26.333 U22.4@31.885,26.425 U22.2@31.885,32.625
NetC16_1: C16.1 R20.1 U4.3 U4.4 | length 18.8
  Bottom Layer w1: C16.1@7.154,15.8 10.9,15.8 11.675,16.575 17.525,16.575 R20.1@17.525,16.411 17.525,12.127 ccw(c17.552,12.127) U4.4@17.552,12.1 U4.3@17.552,8.5
NetC24_1: C24.1 R51.2 R53.1 U15.1 | length 7.2
  Top Layer w0.3: U15.1@71.061,45.295 71.061,46.586 71.5,47.025 R51.2@71.5,48.011 73.05,48.011 C24.1@73.075,47.986 R53.1@73.075,45.314
NetC24_2: C24.2 R19.1 R51.1 R101.2 | length 66.5
  Top Layer w0.3: R101.2@40.277,22.2 46.615,22.2 47.474,21.341 58.316,21.341 59.95,22.975 73.246,22.975 75.805,25.534 75.805,40.445 74.675,41.575 74.675,47.225 73.975,47.925 73.975,49.45 73.71,49.715 C24.2@73.075,49.715 73.051,49.739 R51.1@71.5,49.739 R19.1@69.931,49.739
NetC26_2: C26.2 VR2.1 | length 2.5
  Bottom Layer w0.25: C26.2@34.486,55.316 C26.2@34.486,55.201 34.486,54.489 34.863,54.112 VR2.1@34.863,52.974
NetC27_2: C27.2 R39.1 VR2.5 | length 7.8
  Bottom Layer w0.5: R39.1@31.3,55.202 C27.2@32.9,55.201 32.9,54.3 33.652,53.548 33.652,50.698 33.976,50.374 VR2.5@34.863,50.374
NetC29_2: C29.2 C30.2 T13.1 U12.8 | length 6.1
  Top Layer w0.25: U12.8@42.175,61.825 42.825,61.825
  Top Layer w0.5: 42.825,61.825 45.295,61.825 C29.2@45.359,61.889 ; C29.2@45.359,61.814 48.261,61.814 T13.1@48.275,61.8
NetC31_2: C31.2 R39.2 T6.1 U12.11 | length 54.8
  Top Layer w0.25: U12.11@40.675,61.825 40.675,63.375 v1(40.975,63.675)
  Top Layer w0.3: v1(29.425,47.8) 29.425,46.95 v1(30.25,46.125) ; v1(30.225,63.425) 30.375,63.275 v1(30.375,56.925) ; T6.1@37.425,32.255 37.425,33.496 v1(38.1,34.171)
  Bottom Layer w0.3: v1(29.425,47.8) 30.405,48.78 30.405,56.895 v1(30.375,56.925) 31.296,56.925 R39.2@31.3,56.929 ; v1(30.225,63.425) 32.3,63.425 33.175,64.3 40.35,64.3 v1(40.975,63.675) 40.975,62.75 40.561,62.336 C31.2@40.561,61.339 ; v1(30.25,46.125) 34.475,46.125 35,45.6 35,40.7 38.1,37.6 v1(38.1,34.171)
NetC35_2: C35.2 VR3.1 | length 2.4
  Bottom Layer w0.381: C35.2@57.175,55.316 C35.2@57.175,55.201 57.175,55.025 57.552,54.648 VR3.1@57.552,53.024
NetC36_2: C36.2 R45.1 VR3.5 | length 7.8
  Bottom Layer w0.381: R45.1@54.025,55.336 54.16,55.201 C36.2@55.6,55.201 55.6,54.175 56.35,53.425 56.35,50.675 56.601,50.424 VR3.5@57.552,50.424
NetC40_2: C40.2 R45.2 T9.1 U13.11 | length 63.5
  Top Layer w0.25: U13.11@63.175,61.825 v1(63.175,63.65)
  Top Layer w0.3: T9.1@37.425,29.085 37.442,29.102 37.442,29.812 41.005,33.375 46.8,33.375 v1(46.825,33.4) ; v1(49.2,33.4) 51.75,33.4 52.175,33.825 v1(52.175,35.025) ; v1(52.925,56.9) v1(52.925,64.3)
  Bottom Layer w0.3: v1(46.825,33.4) v1(49.2,33.4) ; v1(52.175,35.025) 52.175,56.15 v1(52.925,56.9) 52.93,56.905 R45.2@54.025,56.905 ; v1(52.925,64.3) 62.525,64.3 v1(63.175,63.65)
  Bottom Layer w0.35: C40.2@62.961,61.6 62.961,62.536 63.175,62.75 v1(63.175,63.65)
NetC44_2: C44.2 C45.2 FB2.1 U19.8 | length 6.6
  Top Layer w0.25: C45.2@22.139,44.9 v1(23.496,44.9) 24.221,44.175 U19.8@25.675,44.175
  Top Layer w0.3: C44.2@20.564,44.9 C45.2@22.114,44.9 C45.2@22.139,44.9
  Bottom Layer w0.3: FB2.1@22.303,44.875 23.471,44.875 v1(23.496,44.9)
NetC47_2: C47.2 C48.2 FB1.1 U20.8 | length 6.8
  Top Layer w0.25: C48.2@44.328,44.9 C48.2@44.367,44.9 v1(45.684,44.9) 46.409,44.175 U20.8@47.863,44.175
  Top Layer w0.3: C47.2@42.753,44.9 C47.2@42.842,44.9 C48.2@44.328,44.9
  Bottom Layer w0.25: FB1.1@44.269,44.875 45.659,44.875 v1(45.684,44.9)
NetC52_2: C52.2 C53.1 R72.2 U24.2 U24.4 | length 6.2
  Top Layer w1.016: U24.4@120.246,34.2 U24.2@126.446,34.2
NetC58_1: C58.1 C59.2 C60.2 L3.2 R73.1 U21.2 | length 24.5
  Top Layer w0.5: U21.2@120.292,7.072 122.703,7.072 123.064,6.711 C60.2@124.247,6.711 ; C60.2@124.247,6.597 125.972,6.597 125.997,6.572 128.147,6.572 128.875,7.3 128.875,9.525 ; R73.1@125.947,9.9 cw(c125.972,9.9) 125.972,9.925 128.475,9.925 ; C58.1@130.525,16.45 130.525,13.45 131.25,12.725 131.25,9.925 L3.2@131.086,9.925 129.275,9.925 ; 128.475,9.925 129.275,9.925 ; 128.475,9.925 128.875,9.525 ; 128.875,9.525 129.275,9.925
NetC63_2: C63.2 R78.1 S1.1 | length 8.1
  Bottom Layer w0.4: R78.1@149.85,25.161 151.748,25.161 151.775,25.188 155.562,25.188 S1.1@157.25,23.5
NetC101_1: C101.1 R15.2 U11.10 | length 6.9
  Top Layer w0.25: U11.10@18.8,61.825 18.8,63.225 19.657,64.082 21.2,64.082 v1(21.216,64.066)
  Bottom Layer w0.3: v1(21.216,64.066) 22.355,64.066 22.371,64.082 23.915,64.082 R15.2@23.921,64.089
NetC102_1: C102.1 R44.2 U12.10 | length 6.2
  Top Layer w0.25: U12.10@41.175,61.825 41.175,62.9 42.2,63.925 v1(43.25,63.925)
  Bottom Layer w0.3: v1(43.25,63.925) 45.822,63.925 C102.1@45.85,63.953
NetC103_1: C103.1 R50.2 U13.10 | length 7.2
  Top Layer w0.25: U13.10@63.675,61.825 63.675,63.15 64.7,64.175 v1@65.875,64.175
  Bottom Layer w0.3: v1(65.875,64.15) 66.381,64.656 R50.2@68.875,64.656
NetC115_2: C115.2 U18.1 X1.1 | length 5.8
  Top Layer w0.3: C115.2@98.25,48.489 98.817,48.489 99.45,47.856 X1.1@99.45,46.305 ; X1.1@99.507,46.362 U18.1@101.856,46.362
  Top Layer w0.305: C115.2@98.239,48.5 C115.2@98.25,48.489
  Top Layer w0.5: X1.1@99.507,46.362 X1.1@99.45,46.305 99.525,46.23 X1.1@99.525,46.032 ; U18.1@101.856,46.362 U18.1@101.875,46.381
NetC116_2: C116.2 U18.2 X1.2 | length 5.3
  Top Layer w0.3: C116.2@98.429,43.214 98.585,43.37 98.772,43.37 99.45,44.048 X1.2@99.45,45.205 ; X1.2@99.525,45.13 U18.2@101.856,45.13
  Top Layer w0.305: C116.2@98.289,43.175 C116.2@98.339,43.125
  Top Layer w0.5: C116.2@98.289,43.125 98.289,43.175 98.25,43.214 C116.2@98.429,43.214 ; X1.2@99.45,45.205 X1.2@99.525,45.13 ; U18.2@101.856,45.13 U18.2@101.875,45.111
NetD2_1: D2.1 R70.2 | length 1.7
  Top Layer w0.5: R70.2@138.196,42.995 138.221,42.97 D2.1@138.221,41.32
NetL8_1: L8.1 PS1.5 | length 5.4
  Top Layer w0.3: L8.1@152.66,43.097 L8.1@152.75,43.007
  Top Layer w1.5: L8.1@152.66,43.097 PS1.5@152.66,48.325
NetP2_1: P2.1 PS1.1 VR4.1 | length 22.2
  Bottom Layer w4: P2.1@141.49,83.8 141.525,83.765 141.525,79.56 VR4.1@144.06,77.025 148.175,77.025 152.66,72.54 PS1.1@152.66,68.645
NetP2_2: P2.2 PS1.2 VR4.2 | length 22
  Top Layer w0.3: P2.2@136.41,83.8 P2.2@136.45,83.76
  Top Layer w4: P2.2@136.45,83.76 VR4.2@136.45,76.025 143.83,68.645 PS1.2@147.58,68.645
NetP6_1: P6.1 Q1.1 R33.1 U28.6 U28.7 | length 40.8
  Top Layer w0.3: v1(66.35,49.75) 68.325,49.75 R33.1@68.336,49.739 68.336,51.601 69.686,52.951 P6.1@78.025,52.951
  Bottom Layer w0.3: v1(66.35,49.75) 66.35,46.8 67.025,46.125 67.025,31.95 69.144,29.831 U28.7@69.144,28.227 ; Q1.1@68.625,25.725 69.144,26.244 U28.7@69.144,28.227 ; U28.6@70.414,28.227 U28.7@69.144,28.227
NetP6_2: P6.2 R52.1 | length 22.2
  Top Layer w0.3: R52.1@64.075,41.814 64.075,42.775 64.707,43.407 64.707,47.032
  Top Layer w0.305: 64.707,47.032 65.25,47.575 v1(67.15,47.575) ; v1(69.275,51.55) 69.277,51.552 75.398,51.552 76.539,50.411 P6.2@78.025,50.411
  Bottom Layer w0.305: v1(67.15,47.575) 67.15,49.425 v1(69.275,51.55)
NetP6_3: P6.3 U28.1 U28.2 | length 28.1
  Top Layer w0.3: v1(70.106,50.85) 75.046,50.85 P6.3@78.025,47.871
  Bottom Layer w0.3: U28.1@67.874,33.527 U28.2@69.144,33.527 69.144,49.888 v1(70.106,50.85)
NetQ1_2: Q1.2 R56.1 | length 2.3
  Bottom Layer w0.3: Q1.2@66.425,24.275 66.425,23.525 66.911,23.039 R56.1@66.911,22.175
NetQ1_3: Q1.3 Q2.1 R56.2 U16.1 | length 40.7
  Top Layer w0.3: Q2.1@35.75,20.35 45.9,20.35 46.3,20.75 v1(63.585,20.75)
  Top Layer w0.5: U16.1@35.675,15.125 35.675,20.275 Q2.1@35.75,20.35
  Bottom Layer w0.3: v1(63.585,20.75) 68.273,20.75 68.639,21.116 R56.2@68.639,22.175 ; R56.2@68.625,22.161 Q1.3@68.625,23.325
NetQ2_2: Q2.2 R101.1 U16.2 U16.3 | length 48.7
  Top Layer w0.3: Q2.2@33.55,21.3 33.591,21.341 33.591,22.951 34.24,23.6 v1(35.75,23.6) 35.75,24.249 35.926,24.425 38.299,24.425 38.475,24.249 R101.1@38.475,22.2
  Bottom Layer w0.5: v1(35.75,23.6) 28.25,23.6 27.8,23.15 27.8,4.1 28.425,3.475 U16.2@31.925,3.475 U16.3@39.425,3.475
NetQ3_1: Q3.1 R111.1 | length 1.6
  Bottom Layer w0.3: R111.1@10.427,64.137 Q3.1@12.058,64.137
NetQ4_1: Q4.1 R112.1 | length 1.6
  Bottom Layer w0.305: R112.1@33.844,63.039 35.449,63.039 Q4.1@35.463,63.025
NetQ5_1: Q5.1 R113.1 | length 1.7
  Bottom Layer w0.305: R113.1@56.525,63.028 56.528,63.025 Q5.1@58.175,63.025
NetQ6_3: Q6.3 R35.1 R36.2 | length 5
  Top Layer w0.381: Q6.3@40.025,29.94 40.07,29.985 40.07,31.435 40.746,32.111 v1(40.746,32.126)
  Bottom Layer w0.381: R35.1@40.736,29.645 40.736,30.987 R36.2@40.686,31.037 40.716,31.067 40.716,32.096 v1(40.746,32.126)
NetR1_2: R1.2 R2.2 R3.2 R4.2 R5.1 | length 6.3
  Top Layer w0.5: R3.2@12.189,39.525 12.202,39.511 R2.2@12.202,37.955 R5.1@13.811,37.955 R4.2@13.811,39.525 R1.2@13.811,41.025
NetR6_2: R6.2 U2.1 | length 39.6
  Top Layer w0.305: v2(6.925,73.1) 6.925,56.025 8.525,54.425 v1(8.525,53.45) ; v1(9.05,43.425) 11.85,43.425 12.189,43.086 R6.2@12.189,40.975
  Bottom Layer w0.3: U2.1@3.275,73.113 U2.1@3.288,73.1
  Bottom Layer w0.305: v1(8.525,53.45) 8.525,47.7 9.05,47.175 v1(9.05,43.425)
  Bottom Layer w0.381: U2.1@3.288,73.1 v2(6.925,73.1)
NetR7_2: R7.2 U2.4 | length 23.4
  Top Layer w0.305: U2.4@3.275,76.923 5.352,76.923 6,76.275 6,58.2 5.85,58.05 v1(5.85,57.05)
  Bottom Layer w0.305: R7.2@5.85,55.939 v1(5.85,57.05)
NetR8_2: R8.2 U2.3 | length 22.1
  Top Layer w0.305: U2.3@3.275,75.653 5.047,75.653 5.375,75.325 5.375,59.275 4.425,58.325 v1(4.425,57.05) v1@4.425,56.95
  Bottom Layer w0.305: R8.2@4.425,55.914 v1(4.425,57.05)
NetR14_2: R14.2 U11.14 | length 1.7
  Top Layer w0.25: R14.2@15.089,61.839 15.103,61.825 U11.14@16.8,61.825
NetR16_2: R16.2 U6.1 U6.2 | length 7.2
  Bottom Layer w0.5: R16.2@53.131,15.365 R16.2@53.491,15.365 ; U6.1@53.136,12.395 53.136,14.96 53.111,14.985 R16.2@53.491,15.365 ; U6.2@54.406,12.395 54.406,15.04 54.081,15.365 R16.2@53.491,15.365